# EAGLE board Night_Clock_2 (EAGLE 6.5.0)
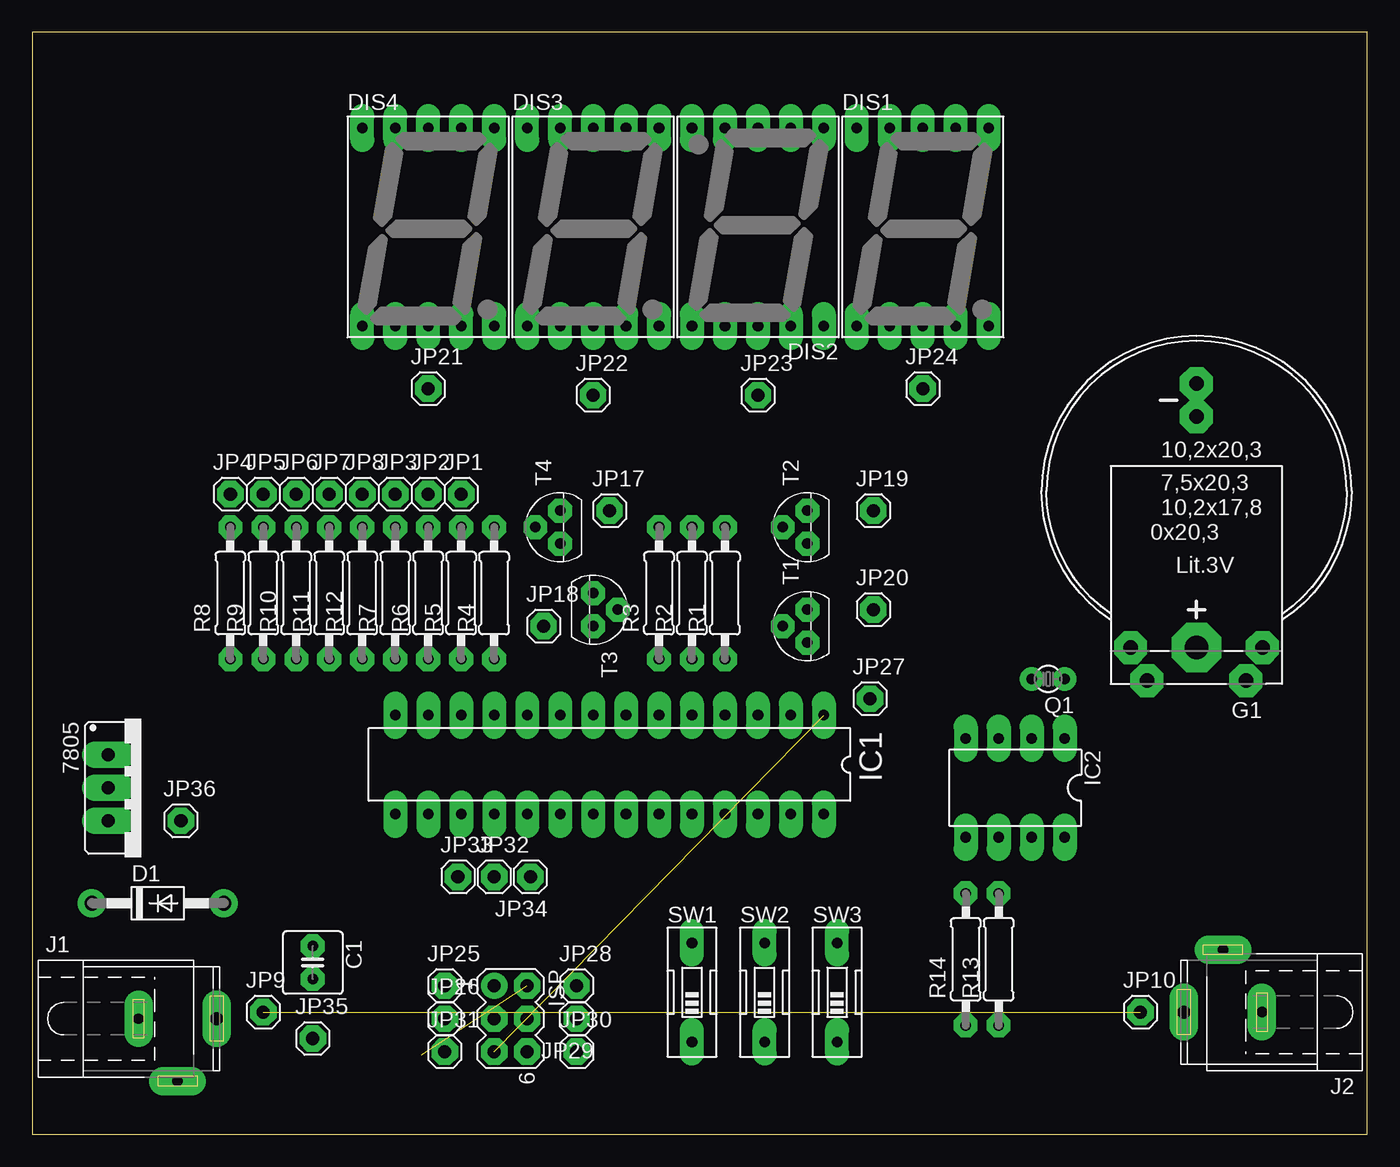
[diagram p0: board, top side]
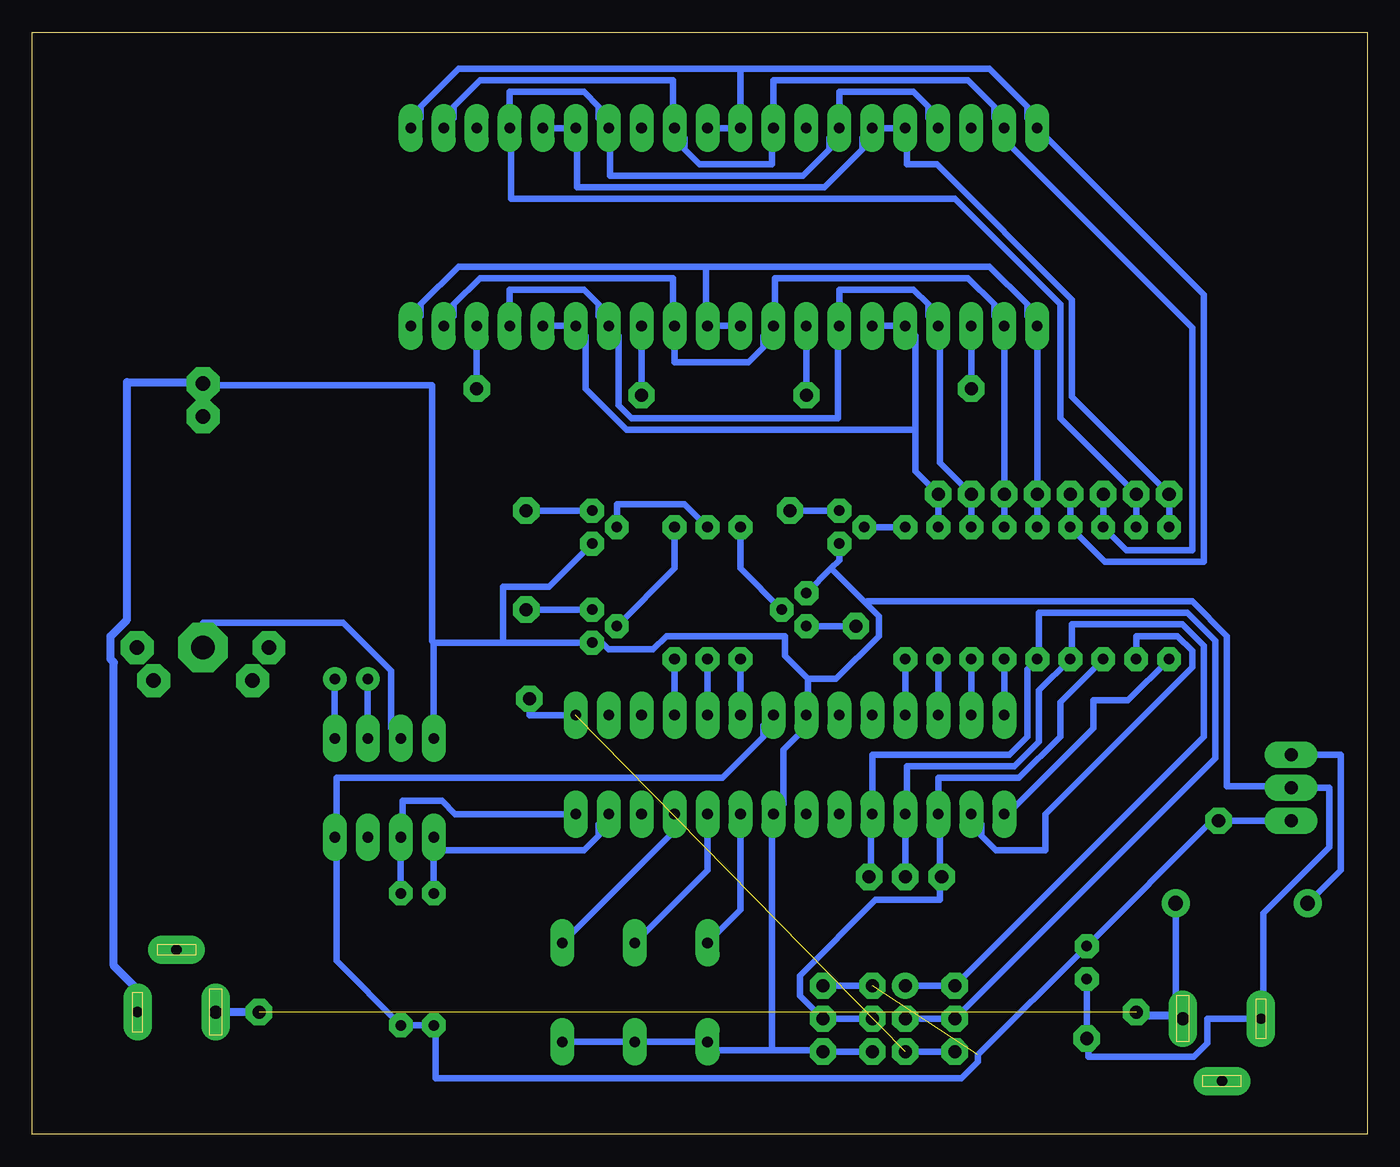
[diagram p1: board, bottom side, seen from below]

Size 102.79 x 84.83 mm. Coordinates in mm from the lower left corner, seen from the top.
Outline: 0,0 102.79,0 102.79,84.83 0,84.83 0,0
Copper layers (1*16): Top 0.035mm / dielectric 1.5mm / Bottom 0.035mm
Design rules "default *": minimum track width 20mil, minimum drill 5mil, track to track 15mil, track to pad 15mil, pad to pad 10mil, via to via 10mil, smd to smd 8mil, copper to edge 18mil, drill to drill 10mil, minimum pad ring 20mil, minimum via ring 8mil, stop-mask expansion 4mil, vias tented up to drill 0mil, thermal gap 10mil
Net classes: 0 default: width 0.381 mm

## Footprints (pad centres in the part's own frame; a part is rotated, then mirrored left to right if it is on the bottom)
78XXS = drill 1.016 long: GND 0,-2.54; IN -2.54,-2.54; OUT 2.54,-2.54
C2.5-5 = drill 0.813 pad 1.6 octagon: 1 -1.27,0; 2 1.27,0
DO41-10 = drill 1.118: A 5.08,0; C -5.08,0
HDSP-M = drill 0.813 long: 1 -5.08,-7.62; 2 -2.54,-7.62; 3 0,-7.62; 4 2.54,-7.62; 5 5.08,-7.62; 6 5.08,7.62; 7 2.54,7.62; 8 0,7.62; 9 -2.54,7.62; 10 -5.08,7.62
B2430UNI = drill 1.118 pad 2.54 octagon: + 3.81,14.605; +@1 -3.81,14.605; +@2 -5.08,12.065; +@3 5.08,12.065; - 0,-5.715; -@1 0,-8.255 | drill 1.803 pad 3.81 octagon: +@4 0,12.065
DIL28-3 = drill 0.813 long: 1 -16.51,-3.81; 2 -13.97,-3.81; 3 -11.43,-3.81; 4 -8.89,-3.81; 5 -6.35,-3.81; 6 -3.81,-3.81; 7 -1.27,-3.81; 8 1.27,-3.81; 9 3.81,-3.81; 10 6.35,-3.81; 11 8.89,-3.81; 12 11.43,-3.81; 13 13.97,-3.81; 14 16.51,-3.81; 15 16.51,3.81; 16 13.97,3.81; 17 11.43,3.81; 18 8.89,3.81; 19 6.35,3.81; 20 3.81,3.81; 21 1.27,3.81; 22 -1.27,3.81; 23 -3.81,3.81; 24 -6.35,3.81; 25 -8.89,3.81; 26 -11.43,3.81; 27 -13.97,3.81; 28 -16.51,3.81
DIP-8 = drill 0.813 long: 1 -3.81,-3.81; 2 -1.27,-3.81; 3 1.27,-3.81; 4 3.81,-3.81; 5 3.81,3.81; 6 1.27,3.81; 7 -1.27,3.81; 8 -3.81,3.81
MA03-2 = drill 1.016: 1 -2.54,-1.27 | drill 1.016 octagon: 2 -2.54,1.27; 3 0,-1.27; 4 0,1.27; 5 2.54,-1.27; 6 2.54,1.27
SPC4078 = drill 0.8 pad 2.184 long: 1 -3,0; 2 0,-4.8 | drill 1 pad 2.184 long: 3 3,0
1X01 = drill 1.016 octagon: 1 0,0
TC26V = drill 0.813: 1 -1.27,0; 2 1.27,0
0207/10 = drill 0.813 octagon: 1 -5.08,0; 2 5.08,0
EDG-01 = drill 0.813 long: 1 0,-3.81; 2 0,3.81
TO92 = drill 0.813 octagon: 1 1.27,0; 2 0,1.905; 3 -1.27,0

## Placement (x,y rotation side)
7805  [78XXS]  8.38,26.67 270 top
C1  25 V 2200uF  [C2.5-5]  21.59,13.21 270 top
D1  1N4004  [DO41-10]  9.65,17.78 0 top
DIS1  HD-H103  [HDSP-M]  68.58,69.85 0 top
DIS2  HD-H103  [HDSP-M]  55.88,69.85 180 top
DIS3  HD-H103  [HDSP-M]  43.18,69.85 0 top
DIS4  HD-H103  [HDSP-M]  30.48,69.85 0 top
G1  CR2032  [B2430UNI]  89.66,49.53 180 top
IC1  MEGA8-P  [DIL28-3]  44.45,28.45 180 top
IC2  DS1307  [DIP-8]  75.69,26.67 180 top
ISP  [MA03-2]  36.83,8.89 270 top
J1  [SPC4078]  11.18,8.89 0 top
J2  [SPC4078]  91.69,9.4 180 top
JP1  [1X01]  33.02,49.28 0 top
JP2  [1X01]  30.48,49.28 0 top
JP3  [1X01]  27.94,49.28 0 top
JP4  [1X01]  15.24,49.28 0 top
JP5  [1X01]  17.78,49.28 0 top
JP6  [1X01]  20.32,49.28 0 top
JP7  [1X01]  22.86,49.28 0 top
JP8  [1X01]  25.4,49.28 0 top
JP9  [1X01]  17.78,9.4 0 top
JP10  [1X01]  85.34,9.4 0 top
JP17  [1X01]  44.45,48.01 0 top
JP18  [1X01]  39.37,39.12 0 top
JP19  [1X01]  64.77,48.01 0 top
JP20  [1X01]  64.77,40.39 0 top
JP21  [1X01]  30.48,57.4 0 top
JP22  [1X01]  43.18,56.9 0 top
JP23  [1X01]  55.88,56.9 0 top
JP24  [1X01]  68.58,57.4 0 top
JP25  [1X01]  31.75,11.43 0 top
JP26  [1X01]  31.75,8.89 0 top
JP27  [1X01]  64.52,33.53 0 top
JP28  [1X01]  41.91,11.43 0 top
JP29  [1X01]  41.91,8.89 180 top
JP30  [1X01]  41.91,6.35 0 top
JP31  [1X01]  31.75,6.35 0 top
JP32  [1X01]  35.56,19.81 0 top
JP33  [1X01]  32.77,19.81 0 top
JP34  [1X01]  38.35,19.81 180 top
JP35  [1X01]  21.59,7.37 0 top
JP36  [1X01]  11.43,24.13 0 top
Q1  32 Khz  [TC26V]  78.23,35.05 180 top
R1  470K  [0207/10]  53.34,41.66 90 top
R2  470K  [0207/10]  50.8,41.66 90 top
R3  470K  [0207/10]  48.26,41.66 90 top
R4  470K  [0207/10]  35.56,41.66 90 top
R5  220  [0207/10]  33.02,41.66 90 top
R6  220  [0207/10]  30.48,41.66 90 top
R7  220  [0207/10]  27.94,41.66 90 top
R8  220  [0207/10]  15.24,41.66 90 top
R9  220  [0207/10]  17.78,41.66 90 top
R10  220  [0207/10]  20.32,41.66 90 top
R11  220  [0207/10]  22.86,41.66 90 top
R12  220  [0207/10]  25.4,41.66 90 top
R13  2.2K  [0207/10]  74.42,13.46 90 top
R14  2.2K  [0207/10]  71.88,13.46 90 top
SW1  [EDG-01]  50.8,10.92 0 top
SW2  [EDG-01]  56.39,10.92 0 top
SW3  [EDG-01]  61.98,10.92 0 top
T1  2N3904  [TO92]  59.69,39.12 90 top
T2  2N3904  [TO92]  59.69,46.74 90 top
T3  2N3904  [TO92]  43.18,40.39 270 top
T4  2N3904  [TO92]  40.64,46.74 90 top

## Library data of the parts
7805 = v-reg
C1 = capacitor-wima
D1 = diode
DIS1-DIS4 = display-hp; OC_FARNELL: unknown; OC_NEWARK: unknown
G1 = battery
IC1 = atmel; OC_FARNELL: unknown; OC_NEWARK: unknown
IC2 = DS1307
ISP = con-lstb; OC_FARNELL: unknown; OC_NEWARK: unknown
J1 J2 = con-jack; OC_FARNELL: unknown; OC_NEWARK: unknown
JP1-JP10 JP17-JP36 = pinhead
Q1 = crystal; OC_FARNELL: unknown; OC_NEWARK: unknown
R1-R14 = eagle-ltspice; SPICEMODEL: NONE; SPICEPREFIX: R
SW1-SW3 = special
T1-T4 = transistor

## Nets
7SEG1: DIS1.7 DIS2.4 DIS3.7 DIS4.9 JP6.1 R10.2
7SEG2: DIS1.6 DIS2.5 DIS3.6 DIS4.10 JP7.1 R11.2
7SEG3: DIS1.4 DIS2.7 DIS3.4 DIS4.2 JP3.1 R7.2
7SEG4: DIS1.2 DIS2.9 DIS3.2 DIS4.4 JP2.1 R6.2
7SEG5: DIS1.1 DIS2.10 DIS3.1 DIS4.5 JP1.1 R5.2
7SEG6: DIS1.9 DIS2.2 DIS3.9 DIS4.7 JP5.1 R9.2
7SEG7: DIS1.10 DIS2.1 DIS3.10 DIS4.6 JP4.1 R8.2
7SEG8: DIS1.5 DIS2.6 DIS3.5 DIS4.1 JP8.1 R12.2
7SEG9: R4.2 T4.2
7SEG10: R3.2 T3.2
7SEG11: R2.2 T2.2
7SEG12: R1.2 T1.2
AVCC: IC1.20
GND: 7805.GND C1.2 G1.-@1 IC1.8 IC1.22 IC2.4 ISP.6 J1.1 J2.1 JP30.1 JP35.1 SW1.1 SW2.1 SW3.1 T1.3 T2.3 T3.3 T4.3
MEG2LED1: IC1.4 R1.1
MEG2LED2: IC1.5 R2.1
MEG2LED3: IC1.6 R3.1
MEG2LED4: IC1.11 R4.1
MEG2LED5: IC1.12 R5.1
MEG2LED6: IC1.13 R6.1
MEG2LED7: IC1.14 R7.1
MEG2LED8: IC1.15 R8.1
MEG2LED9: IC1.16 R9.1
MEG2LED10: IC1.17 ISP.4 JP29.1 JP33.1 R10.1
MEG2LED11: IC1.18 ISP.1 JP25.1 JP32.1 R11.1
MEG2LED12: IC1.19 ISP.3 JP26.1 JP34.1 R12.1
N$5: IC1.1 ISP.5 JP27.1 JP31.1
N$6: IC1.27 IC2.5 R14.2
N$7: IC1.28 IC2.6 R13.2
N$8: JP17.1 T4.1
N$9: JP18.1 T3.1
N$10: IC1.23 SW1.2
N$11: IC1.24 SW2.2
N$12: IC1.25 SW3.2
N$13: G1.+@4 IC2.3
N$14: IC2.2 Q1.2
N$15: IC2.1 Q1.1
N$16: 7805.IN D1.C
N$17: JP19.1 T2.1
N$18: JP20.1 T1.1
N$19: DIS1.3 JP24.1
N$20: DIS2.8 JP23.1
N$21: DIS3.3 JP22.1
N$22: DIS4.3 JP21.1
VCC: 7805.OUT C1.1 IC1.7 IC2.8 ISP.2 JP28.1 JP36.1 R13.1 R14.1
VDD: D1.A J1.3 J2.3 JP9.1 JP10.1

## Tracks (layer width: path | path; a pad name or v marks a point on that pad's centre or on a via)
7SEG1
  Bottom 0.508: JP6.1 R10.2 18.54,44.96 13.46,44.96 13.46,62.1 27.81,76.45 27.81,77.34 DIS4.9 28.7,78.23 28.7,79.12 30.73,81.15 45.72,81.15 DIS3.7 45.85,77.34 45.85,74.68 51.44,74.68 52.58,75.82 52.58,76.71 DIS2.4 53.47,77.6 53.47,81.15 68.33,81.15 70.36,79.12 70.36,78.23 DIS1.7
7SEG2
  Bottom 0.508: JP7.1 R11.2 20.19,44.07 12.57,44.07 12.57,64.64 DIS4.10 26.16,78.23 26.16,79.12 29.08,82.04 48.26,82.04 | 48.26,82.04 DIS3.6 DIS2.5 | DIS1.6 72.9,78.23 72.9,79.12 69.98,82.04 48.26,82.04
7SEG3
  Bottom 0.508: R7.2 JP3.1 DIS4.2 28.7,62.99 28.7,63.88 30.73,65.91 45.59,65.91 45.59,62.36 DIS3.4 46.48,61.47 46.48,60.58 47.62,59.44 53.34,59.44 DIS2.7 53.47,62.36 53.47,65.91 68.33,65.91 70.36,63.88 70.36,62.99 DIS1.4
7SEG4
  Bottom 0.508: DIS1.2 66.04,65.02 60.33,65.02 59.18,63.88 59.18,62.99 DIS2.9 57.66,61.47 57.66,56.13 56.64,55.12 40.77,55.12 40.77,62.1 DIS3.2 40.64,65.02 34.92,65.02 33.78,63.88 33.78,62.99 DIS4.4 32.89,62.1 32.89,51.69 JP2.1 R6.2
7SEG5
  Bottom 0.508: DIS1.1 DIS2.10 60.2,61.47 60.2,57.4 57.02,54.23 34.8,54.23 | DIS3.1 DIS4.5 34.8,61.47 34.8,54.23 | R5.2 JP1.1 34.8,51.05 34.8,54.23
7SEG6
  Bottom 0.508: DIS4.7 33.78,78.23 33.78,79.12 34.92,80.26 40.64,80.26 DIS3.9 41.4,76.71 41.4,75.82 43.43,73.79 58.29,73.79 58.29,77.34 DIS2.2 59.18,78.23 59.18,79.12 60.33,80.26 66.04,80.26 DIS1.9 65.91,77.34 65.91,72.01 31.75,72.01 23.62,63.88 23.62,55.12 JP5.1 R9.2
7SEG7
  Bottom 0.508: R8.2 JP4.1 22.73,56.77 22.73,64.26 33.15,74.68 35.43,74.68 35.43,77.34 DIS4.6 DIS3.10 38.86,76.71 38.86,75.82 41.78,72.9 60.83,72.9 60.83,77.34 DIS2.1 DIS1.10
7SEG8
  Bottom 0.508: R12.2 JP8.1 DIS4.1 26.16,62.99 26.16,63.88 29.08,66.8 50.93,66.8 | DIS3.5 DIS2.6 50.93,62.36 50.93,66.8 | DIS1.5 72.9,62.99 72.9,63.88 69.98,66.8 50.93,66.8
7SEG9
  Bottom 0.508: T4.2 R4.2
7SEG10
  Bottom 0.508: T3.2 48.26,43.56 R3.2
7SEG11
  Bottom 0.508: R2.2 52.58,48.51 57.78,48.51 T2.2
7SEG12
  Bottom 0.508: T1.2 53.34,43.56 R1.2
GND
  Bottom 0.508: 71.88,37.85 66.55,37.85 | 66.55,37.85 T1.3 59.56,37.72 58.8,37.72 58.42,37.34 54.99,37.34 53.98,38.35 44.83,38.35 44.83,36.83 43.05,35.05 | IC2.4 71.88,37.85 | T2.3 62.99,42.16 66.55,42.16 66.55,37.85 | G1.-@1 89.53,57.66 72.01,57.66 72.01,37.97 71.88,37.85 | C1.2 JP35.1 21.46,7.24 21.46,5.97 13.34,5.97 12.32,6.98 12.32,8.89 J1.1 8,9.02 8,17.02 2.92,22.1 2.92,26.67 7805.GND 5.97,26.8 10.79,26.8 10.79,38.35 13.46,41.02 38.48,41.02 38.61,40.89 | ISP.6 JP30.1 42.04,6.48 45.85,6.48 | SW3.1 SW2.1 SW1.1 50.67,6.98 50.67,6.48 45.85,6.48 | 41.27,43.56 40.64,44.2 T4.3 | 41.27,43.56 T3.3 | 38.61,40.89 37.59,39.88 37.59,38.35 40.89,35.05 43.05,35.05 | 38.61,40.89 41.27,43.56 | 43.05,35.05 43.05,32.38 IC1.8 43.18,31.37 44.96,29.59 44.96,25.4 IC1.22 45.85,24.51 45.85,6.48
  Bottom 0.61: G1.-@1 89.66,57.91 95.5,57.91 95.5,39.62 96.77,38.35 96.77,36.58 96.52,36.32 96.52,12.95 94.74,11.18 94.74,8.89 J2.1
MEG2LED1
  Bottom 0.508: R1.1 IC1.4
MEG2LED2
  Bottom 0.508: R2.1 IC1.5
MEG2LED3
  Bottom 0.508: R3.1 IC1.6
MEG2LED4
  Bottom 0.508: R4.1 IC1.11
MEG2LED5
  Bottom 0.508: R5.1 IC1.12
MEG2LED6
  Bottom 0.508: R6.1 IC1.13
MEG2LED7
  Bottom 0.508: R7.1 IC1.14
MEG2LED8
  Bottom 0.508: R8.1 18.41,33.4 21.08,33.4 21.08,31.24 27.69,24.64 IC1.15
MEG2LED9
  Bottom 0.508: IC1.16 29.72,23.88 29.72,22.99 28.57,21.84 24.77,21.84 24.77,24.64 13.46,35.94 13.46,37.21 14.61,38.35 17.78,38.35 R9.1
MEG2LED10
  Bottom 0.508: ISP.4 JP29.1 43.69,10.67 43.69,12.19 37.85,18.03 32.89,18.03 32.89,19.68 JP33.1 32.89,19.94 32.89,24.51 IC1.17 33.02,27.43 26.8,27.43 23.62,30.61 23.62,33.27 R10.1
MEG2LED11
  Bottom 0.508: ISP.1 JP25.1 12.57,30.61 12.57,37.59 14.22,39.24 22.73,39.24 22.73,36.7 R11.1 25.27,34.16 25.27,30.23 27.18,28.32 35.43,28.32 35.43,24.77 IC1.18 JP32.1
MEG2LED12
  Bottom 0.508: ISP.3 JP26.1 11.68,28.96 11.68,37.97 13.84,40.13 25.27,40.13 25.27,36.7 R12.1 26.16,35.81 26.16,30.61 27.56,29.21 38.1,29.21 IC1.19 38.23,24.51 38.23,19.94 JP34.1
N$5  (1 unrouted)
  Bottom 0.508: ISP.5 JP31.1 | IC1.1 64.52,32.26 JP27.1
N$6
  Bottom 0.508: R14.2 IC2.5 71.75,21.84 60.33,21.84 59.18,22.99 59.18,23.88 IC1.27
N$7
  Bottom 0.508: R13.2 IC2.6 74.3,22.99 74.3,25.65 71.25,25.65 70.23,24.64 IC1.28
N$8
  Bottom 0.508: JP17.1 T4.1
N$9
  Bottom 0.508: JP18.1 T3.1
N$10
  Bottom 0.508: SW1.2 48.26,17.27 IC1.23
N$11
  Bottom 0.508: SW2.2 50.8,20.32 IC1.24
N$12
  Bottom 0.508: SW3.2 53.34,23.37 IC1.25
N$13
  Bottom 0.508: IC2.3 75.18,31.24 75.18,35.69 78.87,39.37 89.66,39.37 G1.+@4
N$14
  Bottom 0.508: Q1.2 IC2.2
N$15
  Bottom 0.508: Q1.1 IC2.1
N$16
  Bottom 0.508: 7805.IN 2.03,29.21 2.03,20.32 D1.C
N$17
  Bottom 0.508: JP19.1 T2.1
N$18
  Bottom 0.508: JP20.1 T1.1
N$19
  Bottom 0.508: JP24.1 DIS1.3
N$20
  Bottom 0.508: JP23.1 DIS2.8
N$21
  Bottom 0.508: JP22.1 DIS3.3
N$22
  Bottom 0.508: JP21.1 DIS4.3
VCC  (1 unrouted)
  Bottom 0.508: 7805.OUT JP36.1 11.94,24.13 C1.1 29.97,6.1 29.97,5.59 31.24,4.32 71.75,4.32 71.75,8.26 R14.1 R13.1 79.38,13.33 79.38,22.73 IC2.8 79.38,22.99 79.38,27.43 49.66,27.43 46.48,30.61 46.48,31.5 IC1.7 | JP28.1 ISP.2
VDD  (1 unrouted)
  Bottom 0.508: D1.A 14.73,9.4 14.22,8.89 J1.3
  Bottom 0.61: JP9.1 17.78,9.14 14.73,9.14 J1.3 | JP10.1 J2.3